# Altium PCB Intelligent_Agriculture.PcbDoc (part 4 of 5)
Units mm, origin at the board's own origin, x right, y up, seen from the top; angles counter-clockwise.
Board outline 99.69 x 99.69 mm, 2 copper layers (Top Layer, Bottom Layer); 90 components, 60 nets, 339 pads, 86 vias.
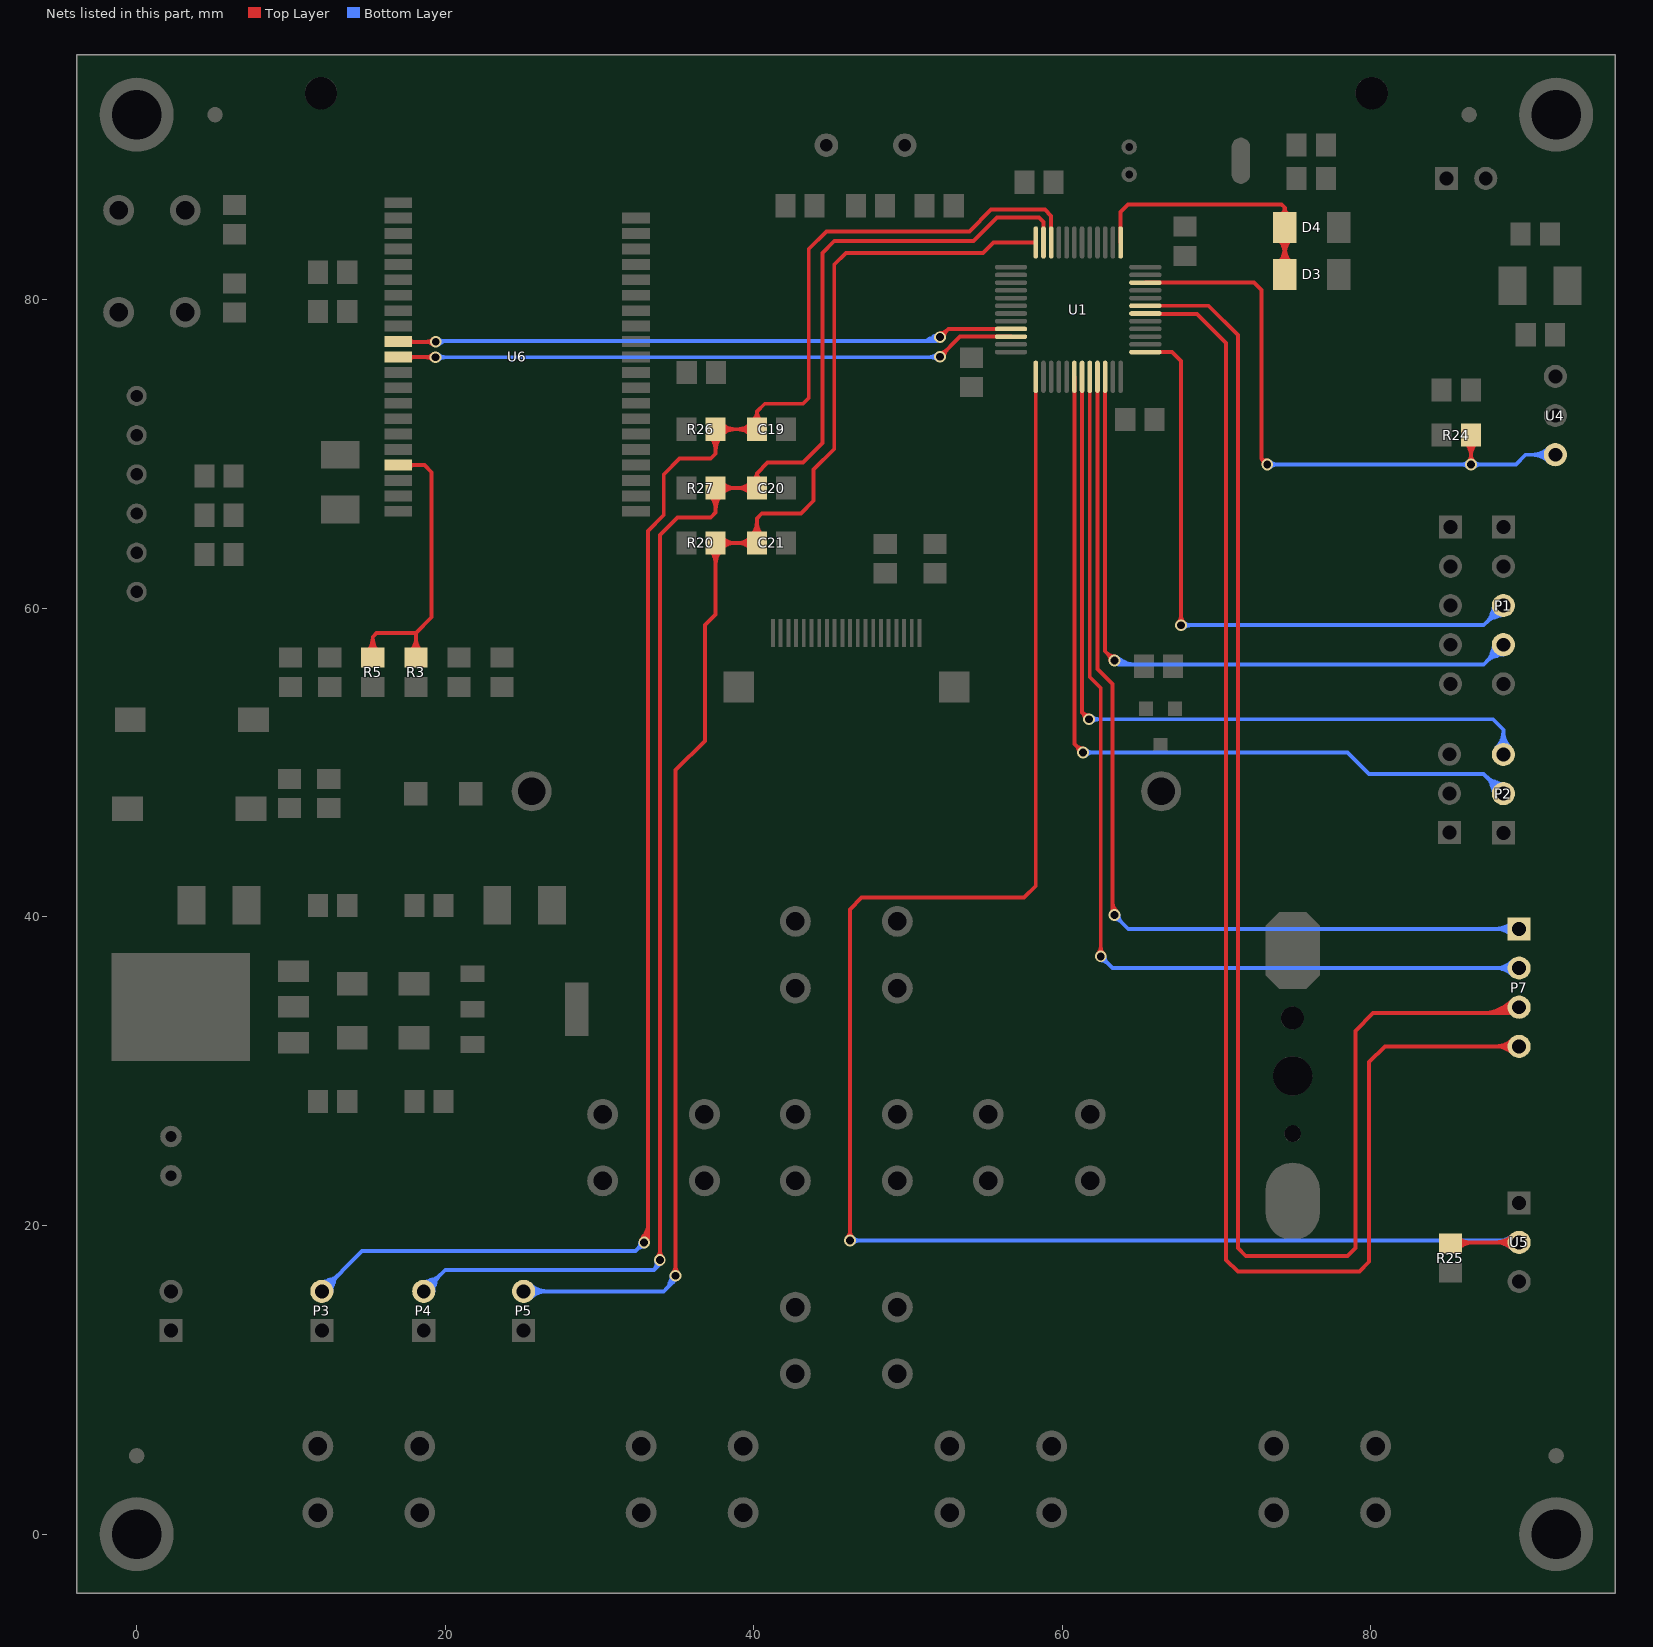
[diagram p4: the nets of this part, all layers, seen from the top]

## Via types
v1: diameter 0.762, hole 0.508, Top Layer to Bottom Layer, tented both sides, 82 vias
v2: diameter 4.8, hole 3.2, Top Layer to Bottom Layer, tented both sides, 4 vias

## Nets (pads, with @x,y where several pads share a name; then routed paths per layer and width w, separated by ;. In a path a pad name is that pad's centre, name@x,y a point inside that pad or via, vN(x,y) a via of type N, cw(c..) or ccw(c..) an arc to the next point about the centre after c; other vN are vias at no path point) (continued)
PA0: C19.2 P3.2 R26.1 U1.10 | length 167
  Top Layer w0.254: U1.10@59.274,83.717 59.274,85.431 58.865,85.84 55.377,85.84 53.975,84.438 44.704,84.438 43.561,83.295 43.561,73.643 43.18,73.262 40.706,73.262 40.198,72.754 ; v1@32.713,19.086 ccw(c31.667,20.132) 33.147,20.132 ; v1@32.713,19.086 ccw(c31.667,20.132) 33.147,20.132 ; v1@32.713,19.086 ccw(c31.667,20.132) 33.147,20.132 ; 32.85,19.322 ccw(c33.159,19.144) v1(32.893,18.906) ; 32.85,19.322 ccw(c33.159,19.144) v1(32.893,18.906) ; 32.85,19.322 ccw(c33.159,19.144) v1(32.893,18.906) ; v1@32.889,19.16 ccw(c32.884,19.43) 33.117,19.295 ; v1@32.889,19.16 ccw(c32.884,19.43) 33.117,19.295 ; v1@32.889,19.16 ccw(c32.884,19.43) 33.117,19.295 ; v1(32.893,18.906) ccw(c32.28,19.519) 33.147,19.519 ; v1(32.893,18.906) ccw(c32.28,19.519) 33.147,19.519 ; v1(32.893,18.906) ccw(c32.28,19.519) 33.147,19.519 ; v1(32.893,18.906) 33.147,19.16 33.147,65.024 34.163,66.04 34.163,68.69 35.179,69.706 37.211,69.706 37.526,70.021 R26.1@37.526,71.611 C19.2@40.198,71.611 40.198,72.754 ; 33.026,19.627 ccw(c33.435,19.39) v1@33.082,19.075 ; 33.026,19.627 ccw(c33.435,19.39) v1@33.082,19.075 ; 33.026,19.627 ccw(c33.435,19.39) v1@33.082,19.075 ; v1@33.115,19.029 cw(c33.351,19.16) 33.117,19.295 ; v1@33.115,19.029 cw(c33.351,19.16) 33.117,19.295 ; v1@33.115,19.029 cw(c33.351,19.16) 33.117,19.295 ; R26.1@37.156,71.141 cw(c36.263,70.248) 37.526,70.248 ; R26.1@37.156,71.141 cw(c36.263,70.248) 37.526,70.248 ; R26.1@37.156,71.141 cw(c36.263,70.248) 37.526,70.248 ; 37.526,70.248 cw(c38.789,70.248) R26.1@37.896,71.141 ; 37.526,70.248 cw(c38.789,70.248) R26.1@37.896,71.141 ; 37.526,70.248 cw(c38.789,70.248) R26.1@37.896,71.141 ; R26.1@37.896,71.241 cw(c38.789,70.348) 38.789,71.611 ; R26.1@37.896,71.241 cw(c38.789,70.348) 38.789,71.611 ; R26.1@37.896,71.241 cw(c38.789,70.348) 38.789,71.611 ; R26.1@37.896,71.981 ccw(c38.789,72.874) 38.789,71.611 ; R26.1@37.896,71.981 ccw(c38.789,72.874) 38.789,71.611 ; R26.1@37.896,71.981 ccw(c38.789,72.874) 38.789,71.611 ; 38.935,71.611 ccw(c38.935,72.874) C19.2@39.828,71.981 ; 38.935,71.611 cw(c38.935,70.348) C19.2@39.828,71.241 ; 38.935,71.611 ccw(c38.935,72.874) C19.2@39.828,71.981 ; 38.935,71.611 cw(c38.935,70.348) C19.2@39.828,71.241 ; 38.935,71.611 ccw(c38.935,72.874) C19.2@39.828,71.981 ; 38.935,71.611 cw(c38.935,70.348) C19.2@39.828,71.241 ; C19.2@39.885,72.13 ccw(c39.42,72.754) 40.198,72.754 ; C19.2@39.885,72.13 ccw(c39.42,72.754) 40.198,72.754 ; C19.2@39.885,72.13 ccw(c39.42,72.754) 40.198,72.754 ; 40.198,72.754 ccw(c40.976,72.754) C19.2@40.511,72.13 ; 40.198,72.754 ccw(c40.976,72.754) C19.2@40.511,72.13 ; 40.198,72.754 ccw(c40.976,72.754) C19.2@40.511,72.13
  Bottom Layer w0.254: P3.2@12.002,15.736 14.605,18.339 32.326,18.339 v1(32.893,18.906) ; P3.2@11.866,15.764 cw(c12.822,15.568) 12.57,16.511 ; P3.2@11.866,15.764 cw(c12.822,15.568) 12.57,16.511 ; P3.2@11.866,15.764 cw(c12.822,15.568) 12.57,16.511 ; P3.2@12.002,16.105 ccw(c12.002,16.996) 12.632,16.366 ; P3.2@12.002,16.105 ccw(c12.002,16.996) 12.632,16.366 ; P3.2@12.002,16.105 ccw(c12.002,16.996) 12.632,16.366 ; P3.2@12.002,16.359 ccw(c12.002,17.863) 13.066,16.8 ; P3.2@12.002,16.359 ccw(c12.002,17.863) 13.066,16.8 ; P3.2@12.002,16.359 ccw(c12.002,17.863) 13.066,16.8 ; P3.2@12.03,15.6 ccw(c11.834,16.556) 12.777,16.304 ; P3.2@12.03,15.6 ccw(c11.834,16.556) 12.777,16.304 ; P3.2@12.03,15.6 ccw(c11.834,16.556) 12.777,16.304 ; P3.2@12.371,15.736 cw(c13.262,15.736) 12.632,16.366 ; P3.2@12.371,15.736 cw(c13.262,15.736) 12.632,16.366 ; P3.2@12.371,15.736 cw(c13.262,15.736) 12.632,16.366 ; P3.2@12.625,15.736 cw(c14.129,15.736) 13.066,16.8 ; P3.2@12.625,15.736 cw(c14.129,15.736) 13.066,16.8 ; P3.2@12.625,15.736 cw(c14.129,15.736) 13.066,16.8 ; 32.459,18.472 ccw(c32.026,18.906) v1@32.639,18.906 ; 32.459,18.472 cw(c32.893,18.039) v1@32.893,18.652 ; 32.459,18.472 ccw(c32.026,18.906) v1@32.639,18.906 ; 32.459,18.472 cw(c32.893,18.039) v1@32.893,18.652 ; 32.459,18.472 ccw(c32.026,18.906) v1@32.639,18.906 ; 32.459,18.472 cw(c32.893,18.039) v1@32.893,18.652
PA1: C20.2 P4.2 R27.1 U1.11 | length 149.8
  Top Layer w0.254: v1(33.909,17.763) 33.909,64.753 35.052,65.896 37.211,65.896 37.526,66.211 R27.1@37.526,67.801 C20.2@40.198,67.801 40.198,68.756 ; U1.11@58.774,83.717 58.774,85.042 58.484,85.332 55.758,85.332 54.229,83.803 45.212,83.803 44.45,83.041 44.45,70.722 43.18,69.452 40.894,69.452 40.198,68.756 ; v1@33.729,17.943 ccw(c33.296,18.376) 33.909,18.376 ; v1@33.729,17.943 ccw(c33.296,18.376) 33.909,18.376 ; v1@33.729,17.943 ccw(c33.296,18.376) 33.909,18.376 ; 33.909,18.376 ccw(c34.522,18.376) v1@34.089,17.943 ; 33.909,18.376 ccw(c34.522,18.376) v1@34.089,17.943 ; 33.909,18.376 ccw(c34.522,18.376) v1@34.089,17.943 ; R27.1@37.156,67.331 cw(c36.263,66.438) 37.526,66.438 ; R27.1@37.156,67.331 cw(c36.263,66.438) 37.526,66.438 ; R27.1@37.156,67.331 cw(c36.263,66.438) 37.526,66.438 ; 37.526,66.438 cw(c38.789,66.438) R27.1@37.896,67.331 ; 37.526,66.438 cw(c38.789,66.438) R27.1@37.896,67.331 ; 37.526,66.438 cw(c38.789,66.438) R27.1@37.896,67.331 ; R27.1@37.896,67.431 cw(c38.789,66.538) 38.789,67.801 ; R27.1@37.896,67.431 cw(c38.789,66.538) 38.789,67.801 ; R27.1@37.896,67.431 cw(c38.789,66.538) 38.789,67.801 ; R27.1@37.896,68.171 ccw(c38.789,69.064) 38.789,67.801 ; R27.1@37.896,68.171 ccw(c38.789,69.064) 38.789,67.801 ; R27.1@37.896,68.171 ccw(c38.789,69.064) 38.789,67.801 ; 38.935,67.801 ccw(c38.935,69.064) C20.2@39.828,68.171 ; 38.935,67.801 cw(c38.935,66.538) C20.2@39.828,67.431 ; 38.935,67.801 ccw(c38.935,69.064) C20.2@39.828,68.171 ; 38.935,67.801 cw(c38.935,66.538) C20.2@39.828,67.431 ; 38.935,67.801 ccw(c38.935,69.064) C20.2@39.828,68.171 ; 38.935,67.801 cw(c38.935,66.538) C20.2@39.828,67.431 ; C20.2@39.96,68.367 ccw(c39.761,68.756) 40.198,68.756 ; C20.2@39.96,68.367 ccw(c39.761,68.756) 40.198,68.756 ; C20.2@39.96,68.367 ccw(c39.761,68.756) 40.198,68.756 ; 40.198,68.756 ccw(c40.635,68.756) C20.2@40.436,68.367 ; 40.198,68.756 ccw(c40.635,68.756) C20.2@40.436,68.367 ; 40.198,68.756 ccw(c40.635,68.756) C20.2@40.436,68.367
  Bottom Layer w0.254: P4.2@18.606,15.736 19.998,17.128 33.528,17.128 ; v1@33.909,17.509 33.528,17.128 ; P4.2@18.47,15.764 cw(c19.426,15.568) 19.174,16.511 ; P4.2@18.47,15.764 cw(c19.426,15.568) 19.174,16.511 ; P4.2@18.47,15.764 cw(c19.426,15.568) 19.174,16.511 ; P4.2@18.606,16.105 ccw(c18.606,16.996) 19.236,16.366 ; P4.2@18.606,16.105 ccw(c18.606,16.996) 19.236,16.366 ; P4.2@18.606,16.105 ccw(c18.606,16.996) 19.236,16.366 ; P4.2@18.606,16.359 ccw(c18.606,17.863) 19.67,16.8 ; P4.2@18.606,16.359 ccw(c18.606,17.863) 19.67,16.8 ; P4.2@18.606,16.359 ccw(c18.606,17.863) 19.67,16.8 ; P4.2@18.634,15.6 ccw(c18.438,16.556) 19.381,16.304 ; P4.2@18.634,15.6 ccw(c18.438,16.556) 19.381,16.304 ; P4.2@18.634,15.6 ccw(c18.438,16.556) 19.381,16.304 ; P4.2@18.975,15.736 cw(c19.866,15.736) 19.236,16.366 ; P4.2@18.975,15.736 cw(c19.866,15.736) 19.236,16.366 ; P4.2@18.975,15.736 cw(c19.866,15.736) 19.236,16.366 ; P4.2@19.229,15.736 cw(c20.733,15.736) 19.67,16.8 ; P4.2@19.229,15.736 cw(c20.733,15.736) 19.67,16.8 ; P4.2@19.229,15.736 cw(c20.733,15.736) 19.67,16.8 ; 33.528,17.128 ccw(c33.134,17.523) v1@33.666,17.688 ; 33.528,17.128 ccw(c33.134,17.523) v1@33.666,17.688 ; 33.528,17.128 ccw(c33.134,17.523) v1@33.666,17.688
PA2: C21.2 P5.2 R20.1 U1.12 | length 140.8
  Top Layer w0.254: v1(34.925,16.747) 34.925,49.513 36.83,51.418 36.83,58.911 37.526,59.607 R20.1@37.526,64.245 C21.2@40.198,64.245 40.198,65.835 40.513,66.15 43.053,66.15 43.879,66.976 43.879,69.008 45.212,70.341 45.212,82.279 45.974,83.041 54.864,83.041 55.54,83.717 U1.12@58.274,83.717 ; v1@34.745,16.927 ccw(c34.312,17.36) 34.925,17.36 ; v1@34.745,16.927 ccw(c34.312,17.36) 34.925,17.36 ; v1@34.745,16.927 ccw(c34.312,17.36) 34.925,17.36 ; 34.925,17.36 ccw(c35.538,17.36) v1@35.105,16.927 ; 34.925,17.36 ccw(c35.538,17.36) v1@35.105,16.927 ; 34.925,17.36 ccw(c35.538,17.36) v1@35.105,16.927 ; R20.1@37.156,63.775 cw(c36.263,62.882) 37.526,62.882 ; R20.1@37.156,63.775 cw(c36.263,62.882) 37.526,62.882 ; R20.1@37.156,63.775 cw(c36.263,62.882) 37.526,62.882 ; 37.526,62.882 cw(c38.789,62.882) R20.1@37.896,63.775 ; 37.526,62.882 cw(c38.789,62.882) R20.1@37.896,63.775 ; 37.526,62.882 cw(c38.789,62.882) R20.1@37.896,63.775 ; R20.1@37.896,63.875 cw(c38.789,62.982) 38.789,64.245 ; R20.1@37.896,63.875 cw(c38.789,62.982) 38.789,64.245 ; R20.1@37.896,63.875 cw(c38.789,62.982) 38.789,64.245 ; R20.1@37.896,64.615 ccw(c38.789,65.508) 38.789,64.245 ; R20.1@37.896,64.615 ccw(c38.789,65.508) 38.789,64.245 ; R20.1@37.896,64.615 ccw(c38.789,65.508) 38.789,64.245 ; 38.935,64.245 ccw(c38.935,65.508) C21.2@39.828,64.615 ; 38.935,64.245 cw(c38.935,62.982) C21.2@39.828,63.875 ; 38.935,64.245 ccw(c38.935,65.508) C21.2@39.828,64.615 ; 38.935,64.245 cw(c38.935,62.982) C21.2@39.828,63.875 ; 38.935,64.245 ccw(c38.935,65.508) C21.2@39.828,64.615 ; 38.935,64.245 cw(c38.935,62.982) C21.2@39.828,63.875 ; C21.2@39.828,64.715 ccw(c38.935,65.608) 40.198,65.608 ; C21.2@39.828,64.715 ccw(c38.935,65.608) 40.198,65.608 ; C21.2@39.828,64.715 ccw(c38.935,65.608) 40.198,65.608 ; 40.198,65.608 ccw(c41.461,65.608) C21.2@40.568,64.715 ; 40.198,65.608 ccw(c41.461,65.608) C21.2@40.568,64.715 ; 40.198,65.608 ccw(c41.461,65.608) C21.2@40.568,64.715
  Bottom Layer w0.254: P5.2@25.083,15.736 34.158,15.736 34.163,15.731 v1@34.925,16.493 ; P5.2@25.344,15.475 cw(c25.974,14.845) 25.974,15.736 ; P5.2@25.344,15.475 cw(c25.974,14.845) 25.974,15.736 ; P5.2@25.344,15.475 cw(c25.974,14.845) 25.974,15.736 ; P5.2@25.344,15.997 ccw(c25.974,16.627) 25.974,15.736 ; P5.2@25.344,15.997 ccw(c25.974,16.627) 25.974,15.736 ; P5.2@25.344,15.997 ccw(c25.974,16.627) 25.974,15.736 ; P5.2@25.524,15.295 cw(c26.587,14.232) 26.587,15.736 ; P5.2@25.524,15.295 cw(c26.587,14.232) 26.587,15.736 ; P5.2@25.524,15.295 cw(c26.587,14.232) 26.587,15.736 ; P5.2@25.524,16.177 ccw(c26.587,17.24) 26.587,15.736 ; P5.2@25.524,16.177 ccw(c26.587,17.24) 26.587,15.736 ; P5.2@25.524,16.177 ccw(c26.587,17.24) 26.587,15.736 ; 34.312,15.88 ccw(c33.445,16.747) v1@34.671,16.747 ; 34.312,15.88 ccw(c33.445,16.747) v1@34.671,16.747 ; 34.312,15.88 ccw(c33.445,16.747) v1@34.671,16.747 ; 34.545,16.276 cw(c35.265,16.083) v1(34.925,16.747) ; 34.545,16.276 cw(c35.265,16.083) v1(34.925,16.747) ; 34.545,16.276 cw(c35.265,16.083) v1(34.925,16.747) ; 34.745,16.313 ccw(c34.312,16.747) v1(34.925,16.747) ; 34.745,16.313 ccw(c34.312,16.747) v1(34.925,16.747) ; 34.745,16.313 ccw(c34.312,16.747) v1(34.925,16.747)
RELAY1: P7.1 U1.33 | length 78.6
  Top Layer w0.254: U1.33@62.274,75.009 62.274,56.073 63.246,55.101 63.246,40.252 v1(63.373,40.125) ; 63.246,41.045 ccw(c64.293,41.045) v1@63.553,40.305 ; 63.246,41.045 ccw(c64.293,41.045) v1@63.553,40.305 ; 63.246,41.045 ccw(c64.293,41.045) v1@63.553,40.305
  Bottom Layer w0.254: v1(63.373,40.125) 64.267,39.231 P7.1@89.599,39.231 ; v1@63.373,39.871 cw(c63.373,39.258) 63.807,39.691 ; v1@63.373,39.871 cw(c63.373,39.258) 63.807,39.691 ; v1@63.373,39.871 cw(c63.373,39.258) 63.807,39.691 ; v1@63.627,40.125 ccw(c64.24,40.125) 63.807,39.691 ; v1@63.627,40.125 ccw(c64.24,40.125) 63.807,39.691 ; v1@63.627,40.125 ccw(c64.24,40.125) 63.807,39.691 ; 88.095,39.231 ccw(c88.095,40.735) P7.1@89.158,39.672 ; 88.095,39.231 cw(c88.095,37.727) P7.1@89.158,38.79 ; 88.095,39.231 ccw(c88.095,40.735) P7.1@89.158,39.672 ; 88.095,39.231 cw(c88.095,37.727) P7.1@89.158,38.79 ; 88.095,39.231 ccw(c88.095,40.735) P7.1@89.158,39.672 ; 88.095,39.231 cw(c88.095,37.727) P7.1@89.158,38.79 ; 88.708,39.231 ccw(c88.708,40.122) P7.1@89.338,39.492 ; 88.708,39.231 cw(c88.708,38.34) P7.1@89.338,38.97 ; 88.708,39.231 ccw(c88.708,40.122) P7.1@89.338,39.492 ; 88.708,39.231 cw(c88.708,38.34) P7.1@89.338,38.97 ; 88.708,39.231 ccw(c88.708,40.122) P7.1@89.338,39.492 ; 88.708,39.231 cw(c88.708,38.34) P7.1@89.338,38.97
RELAY2: P7.2 U1.32 | length 82.3
  Top Layer w0.254: U1.32@61.774,75.009 61.774,55.557 62.484,54.847 62.484,42.782 v1(62.484,37.448) ; v1@62.304,37.628 ccw(c61.871,38.061) 62.484,38.061 ; v1@62.304,37.628 ccw(c61.871,38.061) 62.484,38.061 ; v1@62.304,37.628 ccw(c61.871,38.061) 62.484,38.061 ; 62.484,38.061 ccw(c63.097,38.061) v1@62.664,37.628 ; 62.484,38.061 ccw(c63.097,38.061) v1@62.664,37.628 ; 62.484,38.061 ccw(c63.097,38.061) v1@62.664,37.628
  Bottom Layer w0.254: v1(62.484,37.448) 63.241,36.691 89.53,36.691 P7.2@89.599,36.691 ; v1@62.484,37.194 cw(c62.484,36.581) 62.918,37.014 ; v1@62.484,37.194 cw(c62.484,36.581) 62.918,37.014 ; v1@62.484,37.194 cw(c62.484,36.581) 62.918,37.014 ; v1@62.738,37.448 ccw(c63.351,37.448) 62.918,37.014 ; v1@62.738,37.448 ccw(c63.351,37.448) 62.918,37.014 ; v1@62.738,37.448 ccw(c63.351,37.448) 62.918,37.014 ; 88.095,36.691 ccw(c88.095,38.195) P7.2@89.158,37.132 ; 88.095,36.691 cw(c88.095,35.187) P7.2@89.158,36.25 ; 88.095,36.691 ccw(c88.095,38.195) P7.2@89.158,37.132 ; 88.095,36.691 cw(c88.095,35.187) P7.2@89.158,36.25 ; 88.095,36.691 ccw(c88.095,38.195) P7.2@89.158,37.132 ; 88.095,36.691 cw(c88.095,35.187) P7.2@89.158,36.25 ; 88.708,36.691 ccw(c88.708,37.582) P7.2@89.338,36.952 ; 88.708,36.691 cw(c88.708,35.8) P7.2@89.338,36.43 ; 88.708,36.691 ccw(c88.708,37.582) P7.2@89.338,36.952 ; 88.708,36.691 cw(c88.708,35.8) P7.2@89.338,36.43 ; 88.708,36.691 ccw(c88.708,37.582) P7.2@89.338,36.952 ; 88.708,36.691 cw(c88.708,35.8) P7.2@89.338,36.43
RELAY3: P7.3 U1.43 | length 120.2
  Top Layer w0.254: U1.43@65.378,79.613 69.468,79.613 71.374,77.707 71.374,18.542 71.882,18.034 78.486,18.034 78.994,18.542 78.994,32.622 80.137,33.765 89.213,33.765 P7.3@89.599,34.151 ; 87.163,33.765 ccw(c87.163,36.587) P7.3@89.158,34.592 ; 87.163,33.765 ccw(c87.163,36.587) P7.3@89.158,34.592 ; 87.163,33.765 ccw(c87.163,36.587) P7.3@89.158,34.592 ; 87.776,33.765 ccw(c87.776,35.974) P7.3@89.338,34.412 ; 87.776,33.765 ccw(c87.776,35.974) P7.3@89.338,34.412 ; 87.776,33.765 ccw(c87.776,35.974) P7.3@89.338,34.412 ; 88.389,33.765 ccw(c88.389,35.361) P7.3@89.518,34.232 ; 88.389,33.765 ccw(c88.389,35.361) P7.3@89.518,34.232 ; 88.389,33.765 ccw(c88.389,35.361) P7.3@89.518,34.232 ; 88.526,33.943 cw(c88.732,33.587) P7.3@89.077,33.811 ; 88.526,33.943 cw(c88.732,33.587) P7.3@89.077,33.811 ; 88.526,33.943 cw(c88.732,33.587) P7.3@89.077,33.811 ; 88.758,34.077 cw(c88.957,33.733) P7.3@89.29,33.95 ; 88.758,34.077 cw(c88.957,33.733) P7.3@89.29,33.95 ; 88.758,34.077 cw(c88.957,33.733) P7.3@89.29,33.95 ; 88.858,33.851 ccw(c88.736,34.064) P7.3@88.979,34.088 ; 88.858,33.851 cw(c88.943,33.704) P7.3@89.084,33.8 ; 88.858,33.851 ccw(c88.736,34.064) P7.3@88.979,34.088 ; 88.858,33.851 cw(c88.943,33.704) P7.3@89.084,33.8 ; 88.858,33.851 ccw(c88.736,34.064) P7.3@88.979,34.088 ; 88.858,33.851 cw(c88.943,33.704) P7.3@89.084,33.8
RELAY4: P7.4 U1.42 | length 109.7
  Top Layer w0.254: U1.42@65.378,79.113 65.411,79.081 68.731,79.081 70.612,77.199 70.612,17.78 71.374,17.018 79.248,17.018 79.883,17.653 79.883,30.59 80.904,31.611 P7.4@89.599,31.611 ; 88.095,31.611 ccw(c88.095,33.115) P7.4@89.158,32.052 ; 88.095,31.611 cw(c88.095,30.107) P7.4@89.158,31.17 ; 88.095,31.611 ccw(c88.095,33.115) P7.4@89.158,32.052 ; 88.095,31.611 cw(c88.095,30.107) P7.4@89.158,31.17 ; 88.095,31.611 ccw(c88.095,33.115) P7.4@89.158,32.052 ; 88.095,31.611 cw(c88.095,30.107) P7.4@89.158,31.17 ; 88.708,31.611 ccw(c88.708,32.502) P7.4@89.338,31.872 ; 88.708,31.611 cw(c88.708,30.72) P7.4@89.338,31.35 ; 88.708,31.611 ccw(c88.708,32.502) P7.4@89.338,31.872 ; 88.708,31.611 cw(c88.708,30.72) P7.4@89.338,31.35 ; 88.708,31.611 ccw(c88.708,32.502) P7.4@89.338,31.872 ; 88.708,31.611 cw(c88.708,30.72) P7.4@89.338,31.35
REMOTE: R24.2 U1.46 U4.1 | length 69
  Top Layer w0.254: U1.46@65.378,81.113 72.413,81.113 72.898,80.628 72.898,69.706 ; v1(73.279,69.325) 72.898,69.706 ; R24.2@86.485,71.235 86.487,71.233 v1(86.487,69.325) ; 72.898,69.706 ccw(c73.212,70.02) v1@73.255,69.578 ; 72.898,69.706 cw(c72.584,69.392) v1@73.026,69.349 ; 72.898,69.706 ccw(c73.212,70.02) v1@73.255,69.578 ; 72.898,69.706 cw(c72.584,69.392) v1@73.026,69.349 ; 72.898,69.706 ccw(c73.212,70.02) v1@73.255,69.578 ; 72.898,69.706 cw(c72.584,69.392) v1@73.026,69.349 ; R24.2@86.115,70.765 cw(c85.218,69.868) 86.487,69.868 ; R24.2@86.115,70.765 cw(c85.218,69.868) 86.487,69.868 ; R24.2@86.115,70.765 cw(c85.218,69.868) 86.487,69.868 ; R24.2@86.295,70.945 cw(c85.831,70.481) 86.487,70.481 ; R24.2@86.295,70.945 cw(c85.831,70.481) 86.487,70.481 ; R24.2@86.295,70.945 cw(c85.831,70.481) 86.487,70.481 ; v1@86.307,69.505 ccw(c85.874,69.938) 86.487,69.938 ; v1@86.307,69.505 ccw(c85.874,69.938) 86.487,69.938 ; v1@86.307,69.505 ccw(c85.874,69.938) 86.487,69.938 ; 86.487,69.877 cw(c87.743,69.877) R24.2@86.855,70.765 ; 86.487,69.877 cw(c87.743,69.877) R24.2@86.855,70.765 ; 86.487,69.877 cw(c87.743,69.877) R24.2@86.855,70.765 ; 86.487,69.938 ccw(c87.1,69.938) v1@86.667,69.505 ; 86.487,69.938 ccw(c87.1,69.938) v1@86.667,69.505 ; 86.487,69.938 ccw(c87.1,69.938) v1@86.667,69.505
  Bottom Layer w0.254: v1(73.279,69.325) v1(86.487,69.325) 89.391,69.325 90.026,69.96 U4.1@91.949,69.96 ; v1@73.459,69.145 cw(c73.892,68.712) 73.892,69.325 ; v1@73.459,69.145 cw(c73.892,68.712) 73.892,69.325 ; v1@73.459,69.145 cw(c73.892,68.712) 73.892,69.325 ; v1@73.459,69.505 ccw(c73.892,69.938) 73.892,69.325 ; v1@73.459,69.505 ccw(c73.892,69.938) 73.892,69.325 ; v1@73.459,69.505 ccw(c73.892,69.938) 73.892,69.325 ; 85.874,69.325 ccw(c85.874,69.938) v1@86.307,69.505 ; 85.874,69.325 cw(c85.874,68.712) v1@86.307,69.145 ; 85.874,69.325 ccw(c85.874,69.938) v1@86.307,69.505 ; 85.874,69.325 cw(c85.874,68.712) v1@86.307,69.145 ; 85.874,69.325 ccw(c85.874,69.938) v1@86.307,69.505 ; 85.874,69.325 cw(c85.874,68.712) v1@86.307,69.145 ; v1@86.667,69.145 cw(c87.1,68.712) 87.1,69.325 ; v1@86.667,69.145 cw(c87.1,68.712) 87.1,69.325 ; v1@86.667,69.145 cw(c87.1,68.712) 87.1,69.325 ; v1@86.667,69.505 ccw(c87.1,69.938) 87.1,69.325 ; v1@86.667,69.505 ccw(c87.1,69.938) 87.1,69.325 ; v1@86.667,69.505 ccw(c87.1,69.938) 87.1,69.325 ; 90.445,69.96 ccw(c90.445,71.464) 91.508,70.401 cw(c90.445,71.464) 90.445,69.96 ; 90.445,69.96 cw(c90.445,68.456) 91.508,69.519 ccw(c90.445,68.456) 90.445,69.96 ; 91.058,69.96 ccw(c91.058,70.851) 91.688,70.221 cw(c91.058,70.851) 91.058,69.96 ; 91.058,69.96 cw(c91.058,69.069) 91.688,69.699 ccw(c91.058,69.069) 91.058,69.96
RX1: P2.3 U1.31 | length 71.1
  Top Layer w0.254: U1.31@61.274,75.009 61.274,53.263 v1(61.722,52.815) ; 61.288,53.249 ccw(c61.722,53.682) v1@61.722,53.069 ; 61.288,53.249 cw(c60.855,52.815) v1@61.468,52.815 ; 61.288,53.249 ccw(c61.722,53.682) v1@61.722,53.069 ; 61.288,53.249 cw(c60.855,52.815) v1@61.468,52.815 ; 61.288,53.249 ccw(c61.722,53.682) v1@61.722,53.069 ; 61.288,53.249 cw(c60.855,52.815) v1@61.468,52.815 ; 61.382,53.135 ccw(c61.811,53.25) v1(61.722,52.815) ; 61.382,53.135 ccw(c61.811,53.25) v1(61.722,52.815) ; 61.382,53.135 ccw(c61.811,53.25) v1(61.722,52.815) ; 61.402,53.155 cw(c61.287,52.726) v1(61.722,52.815) ; 61.402,53.155 cw(c61.287,52.726) v1(61.722,52.815) ; 61.402,53.155 cw(c61.287,52.726) v1(61.722,52.815)
  Bottom Layer w0.254: v1(61.722,52.815) 87.901,52.815 88.583,52.133 P2.3@88.583,50.534 ; v1@61.902,52.635 cw(c62.335,52.202) 62.335,52.815 ; v1@61.902,52.635 cw(c62.335,52.202) 62.335,52.815 ; v1@61.902,52.635 cw(c62.335,52.202) 62.335,52.815 ; v1@61.902,52.995 ccw(c62.335,53.428) 62.335,52.815 ; v1@61.902,52.995 ccw(c62.335,53.428) 62.335,52.815 ; v1@61.902,52.995 ccw(c62.335,53.428) 62.335,52.815 ; P2.3@88.142,50.975 ccw(c87.079,52.038) 88.583,52.038 ; P2.3@88.142,50.975 ccw(c87.079,52.038) 88.583,52.038 ; P2.3@88.142,50.975 ccw(c87.079,52.038) 88.583,52.038 ; P2.3@88.322,50.795 ccw(c87.692,51.425) 88.583,51.425 ; P2.3@88.322,50.795 ccw(c87.692,51.425) 88.583,51.425 ; P2.3@88.322,50.795 ccw(c87.692,51.425) 88.583,51.425 ; 88.583,51.425 ccw(c89.474,51.425) P2.3@88.844,50.795 ; 88.583,51.425 ccw(c89.474,51.425) P2.3@88.844,50.795 ; 88.583,51.425 ccw(c89.474,51.425) P2.3@88.844,50.795 ; 88.583,52.038 ccw(c90.087,52.038) P2.3@89.024,50.975 ; 88.583,52.038 ccw(c90.087,52.038) P2.3@89.024,50.975 ; 88.583,52.038 ccw(c90.087,52.038) P2.3@89.024,50.975
RX3: U1.22 U6.30 | length 57.3
  Top Layer w0.254: U6.30@16.922,76.282 v1@19.363,76.282 ; U1.22@56.67,77.613 53.373,77.613 v1(52.07,76.31) ; U6.30@17.63,76.124 cw(c18.01,75.744) 18.01,76.282 ; U6.30@17.63,76.124 cw(c18.01,75.744) 18.01,76.282 ; U6.30@17.63,76.124 cw(c18.01,75.744) 18.01,76.282 ; U6.30@17.63,76.44 ccw(c18.01,76.82) 18.01,76.282 ; U6.30@17.63,76.44 ccw(c18.01,76.82) 18.01,76.282 ; U6.30@17.63,76.44 ccw(c18.01,76.82) 18.01,76.282 ; 18.743,76.282 cw(c18.743,75.652) v1@19.188,76.097 ; 18.743,76.282 cw(c18.743,75.652) v1@19.188,76.097 ; 18.743,76.282 cw(c18.743,75.652) v1@19.188,76.097 ; 18.767,76.282 ccw(c18.767,76.878) v1@19.188,76.457 ; 18.767,76.282 ccw(c18.767,76.878) v1@19.188,76.457 ; 18.767,76.282 ccw(c18.767,76.878) v1@19.188,76.457 ; v1(52.07,76.31) ccw(c51.981,76.745) 52.41,76.63 ; v1(52.07,76.31) cw(c52.505,76.221) 52.39,76.65 ; v1(52.07,76.31) ccw(c51.981,76.745) 52.41,76.63 ; v1(52.07,76.31) cw(c52.505,76.221) 52.39,76.65 ; v1(52.07,76.31) ccw(c51.981,76.745) 52.41,76.63 ; v1(52.07,76.31) cw(c52.505,76.221) 52.39,76.65 ; v1@52.07,76.564 ccw(c52.07,77.177) 52.504,76.744 ; v1@52.07,76.564 ccw(c52.07,77.177) 52.504,76.744 ; v1@52.07,76.564 ccw(c52.07,77.177) 52.504,76.744 ; v1@52.324,76.31 cw(c52.937,76.31) 52.504,76.744 ; v1@52.324,76.31 cw(c52.937,76.31) 52.504,76.744 ; v1@52.324,76.31 cw(c52.937,76.31) 52.504,76.744
  Bottom Layer w0.254: v1(19.368,76.277) v1@52.037,76.277 ; v1@19.548,76.097 cw(c19.981,75.664) 19.981,76.277 ; v1@19.548,76.097 cw(c19.981,75.664) 19.981,76.277 ; v1@19.548,76.097 cw(c19.981,75.664) 19.981,76.277 ; v1@19.548,76.457 ccw(c19.981,76.89) 19.981,76.277 ; v1@19.548,76.457 ccw(c19.981,76.89) 19.981,76.277 ; v1@19.548,76.457 ccw(c19.981,76.89) 19.981,76.277 ; 51.377,76.277 ccw(c51.377,77.003) v1@51.89,76.49 ; 51.377,76.277 ccw(c51.377,77.003) v1@51.89,76.49 ; 51.377,76.277 ccw(c51.377,77.003) v1@51.89,76.49 ; 51.536,76.277 cw(c51.536,75.776) v1@51.89,76.13 ; 51.536,76.277 cw(c51.536,75.776) v1@51.89,76.13 ; 51.536,76.277 cw(c51.536,75.776) v1@51.89,76.13
STATUS: R3.1 R5.1 U6.37 | length 33.5
  Top Layer w0.254: R5.1@15.304,56.818 15.304,58.154 15.558,58.408 18.098,58.408 ; U6.37@16.922,69.282 18.654,69.282 19.114,68.822 19.114,59.424 18.098,58.408 ; R3.1@18.098,56.818 18.098,58.408 ; R5.1@14.934,57.188 ccw(c14.041,58.081) 15.304,58.081 ; R5.1@14.934,57.188 ccw(c14.041,58.081) 15.304,58.081 ; R5.1@14.934,57.188 ccw(c14.041,58.081) 15.304,58.081 ; 15.304,58.081 ccw(c16.567,58.081) R5.1@15.674,57.188 ; 15.304,58.081 ccw(c16.567,58.081) R5.1@15.674,57.188 ; 15.304,58.081 ccw(c16.567,58.081) R5.1@15.674,57.188 ; U6.37@17.63,69.124 cw(c18.01,68.744) 18.01,69.282 ; U6.37@17.63,69.124 cw(c18.01,68.744) 18.01,69.282 ; U6.37@17.63,69.124 cw(c18.01,68.744) 18.01,69.282 ; U6.37@17.63,69.44 ccw(c18.01,69.82) 18.01,69.282 ; U6.37@17.63,69.44 ccw(c18.01,69.82) 18.01,69.282 ; U6.37@17.63,69.44 ccw(c18.01,69.82) 18.01,69.282 ; R3.1@17.728,57.188 ccw(c16.835,58.081) 18.098,58.081 ; R3.1@17.728,57.188 ccw(c16.835,58.081) 18.098,58.081 ; R3.1@17.728,57.188 ccw(c16.835,58.081) 18.098,58.081 ; 18.098,58.081 ccw(c19.361,58.081) R3.1@18.468,57.188 ; 18.098,58.081 ccw(c19.361,58.081) R3.1@18.468,57.188 ; 18.098,58.081 ccw(c19.361,58.081) R3.1@18.468,57.188
SWCLK: P1.3 U1.37 | length 64.6
  Top Layer w0.254: U1.37@65.378,76.613 67.105,76.613 67.691,76.027 v1(67.691,58.911) ; v1@67.511,59.091 ccw(c67.078,59.524) 67.691,59.524 ; v1@67.511,59.091 ccw(c67.078,59.524) 67.691,59.524 ; v1@67.511,59.091 ccw(c67.078,59.524) 67.691,59.524 ; 67.691,59.524 ccw(c68.304,59.524) v1@67.871,59.091 ; 67.691,59.524 ccw(c68.304,59.524) v1@67.871,59.091 ; 67.691,59.524 ccw(c68.304,59.524) v1@67.871,59.091
  Bottom Layer w0.254: v1(67.691,58.911) 87.308,58.911 P1.3@88.583,60.186 ; v1@67.871,58.731 cw(c68.304,58.298) 68.304,58.911 ; v1@67.871,58.731 cw(c68.304,58.298) 68.304,58.911 ; v1@67.871,58.731 cw(c68.304,58.298) 68.304,58.911 ; v1@67.871,59.091 ccw(c68.304,59.524) 68.304,58.911 ; v1@67.871,59.091 ccw(c68.304,59.524) 68.304,58.911 ; v1@67.871,59.091 ccw(c68.304,59.524) 68.304,58.911 ; 87.519,59.122 ccw(c86.456,60.186) P1.3@87.96,60.186 ; 87.519,59.122 cw(c88.583,58.059) P1.3@88.583,59.563 ; 87.519,59.122 ccw(c86.456,60.186) P1.3@87.96,60.186 ; 87.519,59.122 cw(c88.583,58.059) P1.3@88.583,59.563 ; 87.519,59.122 ccw(c86.456,60.186) P1.3@87.96,60.186 ; 87.519,59.122 cw(c88.583,58.059) P1.3@88.583,59.563 ; 87.808,59.618 cw(c88.751,59.366) P1.3@88.555,60.322 ; 87.808,59.618 cw(c88.751,59.366) P1.3@88.555,60.322 ; 87.808,59.618 cw(c88.751,59.366) P1.3@88.555,60.322 ; 87.953,59.556 ccw(c87.323,60.186) P1.3@88.214,60.186 ; 87.953,59.556 cw(c88.583,58.926) P1.3@88.583,59.817 ; 87.953,59.556 ccw(c87.323,60.186) P1.3@88.214,60.186 ; 87.953,59.556 cw(c88.583,58.926) P1.3@88.583,59.817 ; 87.953,59.556 ccw(c87.323,60.186) P1.3@88.214,60.186 ; 87.953,59.556 cw(c88.583,58.926) P1.3@88.583,59.817 ; 88.015,59.411 ccw(c87.763,60.354) P1.3@88.719,60.158 ; 88.015,59.411 ccw(c87.763,60.354) P1.3@88.719,60.158 ; 88.015,59.411 ccw(c87.763,60.354) P1.3@88.719,60.158
SWDIO: P1.4 U1.34 | length 78.4
  Top Layer w0.254: U1.34@62.774,75.009 62.774,57.224 v1(63.373,56.625) ; 62.939,57.059 ccw(c63.373,57.492) v1@63.373,56.879 ; 62.939,57.059 cw(c62.506,56.625) v1@63.119,56.625 ; 62.939,57.059 ccw(c63.373,57.492) v1@63.373,56.879 ; 62.939,57.059 cw(c62.506,56.625) v1@63.119,56.625 ; 62.939,57.059 ccw(c63.373,57.492) v1@63.373,56.879 ; 62.939,57.059 cw(c62.506,56.625) v1@63.119,56.625 ; 63.033,56.945 ccw(c63.462,57.06) v1(63.373,56.625) ; 63.033,56.945 ccw(c63.462,57.06) v1(63.373,56.625) ; 63.033,56.945 ccw(c63.462,57.06) v1(63.373,56.625) ; 63.053,56.965 cw(c62.938,56.536) v1(63.373,56.625) ; 63.053,56.965 cw(c62.938,56.536) v1(63.373,56.625) ; 63.053,56.965 cw(c62.938,56.536) v1(63.373,56.625)
  Bottom Layer w0.254: P1.4@88.583,57.646 87.308,56.371 63.627,56.371 v1(63.373,56.625) ; v1(63.373,56.625) ccw(c63.986,57.238) 63.986,56.371 ; v1(63.373,56.625) cw(c63.611,56.359) 63.789,56.668 ; v1(63.373,56.625) ccw(c63.986,57.238) 63.986,56.371 ; v1(63.373,56.625) cw(c63.611,56.359) 63.789,56.668 ; v1(63.373,56.625) cw(c63.611,56.359) 63.789,56.668 ; v1(63.373,56.625) ccw(c63.986,57.238) 63.986,56.371 ; v1@63.496,56.403 cw(c63.627,56.167) 63.762,56.401 ; v1@63.496,56.403 cw(c63.627,56.167) 63.762,56.401 ; v1@63.496,56.403 cw(c63.627,56.167) 63.762,56.401 ; v1@63.542,56.436 cw(c63.857,56.083) 64.094,56.492 ; v1@63.542,56.436 cw(c63.857,56.083) 64.094,56.492 ; v1@63.542,56.436 cw(c63.857,56.083) 64.094,56.492 ; v1@63.553,56.805 ccw(c64.599,57.851) 64.599,56.371 ; v1@63.553,56.805 ccw(c64.599,57.851) 64.599,56.371 ; v1@63.553,56.805 ccw(c64.599,57.851) 64.599,56.371 ; v1@63.627,56.629 ccw(c63.897,56.634) 63.762,56.401 ; v1@63.627,56.629 ccw(c63.897,56.634) 63.762,56.401 ; v1@63.627,56.629 ccw(c63.897,56.634) 63.762,56.401 ; 87.519,56.582 ccw(c86.456,57.646) P1.4@87.96,57.646 ; 87.519,56.582 cw(c88.583,55.519) P1.4@88.583,57.023 ; 87.519,56.582 ccw(c86.456,57.646) P1.4@87.96,57.646 ; 87.519,56.582 cw(c88.583,55.519) P1.4@88.583,57.023 ; 87.519,56.582 ccw(c86.456,57.646) P1.4@87.96,57.646 ; 87.519,56.582 cw(c88.583,55.519) P1.4@88.583,57.023 ; 87.808,57.078 cw(c88.751,56.826) P1.4@88.555,57.782 ; 87.808,57.078 cw(c88.751,56.826) P1.4@88.555,57.782 ; 87.808,57.078 cw(c88.751,56.826) P1.4@88.555,57.782 ; 87.953,57.016 ccw(c87.323,57.646) P1.4@88.214,57.646 ; 87.953,57.016 cw(c88.583,56.386) P1.4@88.583,57.277 ; 87.953,57.016 ccw(c87.323,57.646) P1.4@88.214,57.646 ; 87.953,57.016 cw(c88.583,56.386) P1.4@88.583,57.277 ; 87.953,57.016 ccw(c87.323,57.646) P1.4@88.214,57.646 ; 87.953,57.016 cw(c88.583,56.386) P1.4@88.583,57.277 ; 88.015,56.871 ccw(c87.763,57.814) P1.4@88.719,57.618 ; 88.015,56.871 ccw(c87.763,57.814) P1.4@88.719,57.618 ; 88.015,56.871 ccw(c87.763,57.814) P1.4@88.719,57.618
TEMPER: R25.1 U1.25 U5.2 | length 150.1
  Top Layer w0.254: v1(46.228,19.033) 46.228,40.496 46.99,41.258 57.514,41.258 58.274,42.018 U1.25@58.274,75.009 ; R25.1@85.154,18.845 85.22,18.911 U5.2@89.599,18.911 ; v1@46.048,19.213 ccw(c45.615,19.646) 46.228,19.646 ; v1@46.048,19.213 ccw(c45.615,19.646) 46.228,19.646 ; v1@46.048,19.213 ccw(c45.615,19.646) 46.228,19.646 ; 46.228,19.646 ccw(c46.841,19.646) v1@46.408,19.213 ; 46.228,19.646 ccw(c46.841,19.646) v1@46.408,19.213 ; 46.228,19.646 ccw(c46.841,19.646) v1@46.408,19.213 ; R25.1@85.444,18.655 cw(c86.063,18.036) 86.063,18.911 ; R25.1@85.444,18.655 cw(c86.063,18.036) 86.063,18.911 ; R25.1@85.444,18.655 cw(c86.063,18.036) 86.063,18.911 ; R25.1@85.624,18.475 cw(c86.676,17.423) 86.676,18.911 ; R25.1@85.624,18.475 cw(c86.676,17.423) 86.676,18.911 ; R25.1@85.624,18.475 cw(c86.676,17.423) 86.676,18.911 ; R25.1@85.624,19.215 ccw(c86.357,19.948) 86.357,18.911 ; R25.1@85.624,19.215 ccw(c86.357,19.948) 86.357,18.911 ; R25.1@85.624,19.215 ccw(c86.357,19.948) 86.357,18.911 ; 88.095,18.911 ccw(c88.095,20.415) U5.2@89.158,19.352 ; 88.095,18.911 cw(c88.095,17.407) U5.2@89.158,18.47 ; 88.095,18.911 ccw(c88.095,20.415) U5.2@89.158,19.352 ; 88.095,18.911 cw(c88.095,17.407) U5.2@89.158,18.47 ; 88.095,18.911 ccw(c88.095,20.415) U5.2@89.158,19.352 ; 88.095,18.911 cw(c88.095,17.407) U5.2@89.158,18.47 ; 88.708,18.911 ccw(c88.708,19.802) U5.2@89.338,19.172 ; 88.708,18.911 cw(c88.708,18.02) U5.2@89.338,18.65 ; 88.708,18.911 ccw(c88.708,19.802) U5.2@89.338,19.172 ; 88.708,18.911 cw(c88.708,18.02) U5.2@89.338,18.65 ; 88.708,18.911 ccw(c88.708,19.802) U5.2@89.338,19.172 ; 88.708,18.911 cw(c88.708,18.02) U5.2@89.338,18.65
  Bottom Layer w0.254: v1(46.228,19.033) U5.2@89.477,19.033 ; v1@46.408,18.853 cw(c46.841,18.42) 46.841,19.033 ; v1@46.408,18.853 cw(c46.841,18.42) 46.841,19.033 ; v1@46.408,18.853 cw(c46.841,18.42) 46.841,19.033 ; v1@46.408,19.213 ccw(c46.841,19.646) 46.841,19.033 ; v1@46.408,19.213 ccw(c46.841,19.646) 46.841,19.033 ; v1@46.408,19.213 ccw(c46.841,19.646) 46.841,19.033 ; 87.8,19.033 cw(c87.8,17.112) U5.2@89.158,18.47 ; 87.8,19.033 cw(c87.8,17.112) U5.2@89.158,18.47 ; 87.8,19.033 cw(c87.8,17.112) U5.2@89.158,18.47 ; 88.389,19.033 ccw(c88.389,20.121) U5.2@89.158,19.352 ; 88.389,19.033 ccw(c88.389,20.121) U5.2@89.158,19.352 ; 88.389,19.033 ccw(c88.389,20.121) U5.2@89.158,19.352 ; 88.414,19.033 cw(c88.414,17.726) U5.2@89.338,18.65 ; 88.414,19.033 cw(c88.414,17.726) U5.2@89.338,18.65 ; 88.414,19.033 cw(c88.414,17.726) U5.2@89.338,18.65
TX1: P2.2 U1.30 | length 79.4
  Top Layer w0.254: U1.30@60.774,75.009 60.774,51.223 v1(61.341,50.656) ; 60.907,51.09 ccw(c61.341,51.523) v1@61.341,50.91 ; 60.907,51.09 cw(c60.474,50.656) v1@61.087,50.656 ; 60.907,51.09 ccw(c61.341,51.523) v1@61.341,50.91 ; 60.907,51.09 cw(c60.474,50.656) v1@61.087,50.656 ; 60.907,51.09 ccw(c61.341,51.523) v1@61.341,50.91 ; 60.907,51.09 cw(c60.474,50.656) v1@61.087,50.656 ; 61.001,50.976 ccw(c61.43,51.091) v1(61.341,50.656) ; 61.001,50.976 ccw(c61.43,51.091) v1(61.341,50.656) ; 61.001,50.976 ccw(c61.43,51.091) v1(61.341,50.656) ; 61.021,50.996 cw(c60.906,50.567) v1(61.341,50.656) ; 61.021,50.996 cw(c60.906,50.567) v1(61.341,50.656) ; 61.021,50.996 cw(c60.906,50.567) v1(61.341,50.656)
  Bottom Layer w0.254: v1(61.341,50.656) 78.486,50.656 79.866,49.276 87.301,49.276 P2.2@88.583,47.994 ; v1@61.521,50.476 cw(c61.954,50.043) 61.954,50.656 ; v1@61.521,50.476 cw(c61.954,50.043) 61.954,50.656 ; v1@61.521,50.476 cw(c61.954,50.043) 61.954,50.656 ; v1@61.521,50.836 ccw(c61.954,51.269) 61.954,50.656 ; v1@61.521,50.836 ccw(c61.954,51.269) 61.954,50.656 ; v1@61.521,50.836 ccw(c61.954,51.269) 61.954,50.656 ; 87.519,49.058 ccw(c88.583,50.121) P2.2@88.583,48.617 ; 87.519,49.058 cw(c86.456,47.994) P2.2@87.96,47.994 ; 87.519,49.058 ccw(c88.583,50.121) P2.2@88.583,48.617 ; 87.519,49.058 cw(c86.456,47.994) P2.2@87.96,47.994 ; 87.519,49.058 ccw(c88.583,50.121) P2.2@88.583,48.617 ; 87.519,49.058 cw(c86.456,47.994) P2.2@87.96,47.994 ; 87.808,48.562 ccw(c88.751,48.814) P2.2@88.555,47.858 ; 87.808,48.562 ccw(c88.751,48.814) P2.2@88.555,47.858 ; 87.808,48.562 ccw(c88.751,48.814) P2.2@88.555,47.858 ; 87.953,48.624 ccw(c88.583,49.254) P2.2@88.583,48.363 ; 87.953,48.624 cw(c87.323,47.994) P2.2@88.214,47.994 ; 87.953,48.624 ccw(c88.583,49.254) P2.2@88.583,48.363 ; 87.953,48.624 cw(c87.323,47.994) P2.2@88.214,47.994 ; 87.953,48.624 ccw(c88.583,49.254) P2.2@88.583,48.363 ; 87.953,48.624 cw(c87.323,47.994) P2.2@88.214,47.994 ; 88.015,48.769 cw(c87.763,47.826) P2.2@88.719,48.022 ; 88.015,48.769 cw(c87.763,47.826) P2.2@88.719,48.022 ; 88.015,48.769 cw(c87.763,47.826) P2.2@88.719,48.022
TX3: U1.21 U6.29 | length 65
  Top Layer w0.254: U6.29@16.477,77.277 v1(19.382,77.277) v1@19.431,77.326 ; U1.21@56.67,78.113 52.603,78.113 v1(52.07,77.58) ; U6.29@17.63,77.124 cw(c17.998,76.756) 17.998,77.277 ; U6.29@17.63,77.124 cw(c17.998,76.756) 17.998,77.277 ; U6.29@17.63,77.124 cw(c17.998,76.756) 17.998,77.277 ; U6.29@17.63,77.44 ccw(c18.022,77.832) 18.022,77.277 ; U6.29@17.63,77.44 ccw(c18.022,77.832) 18.022,77.277 ; U6.29@17.63,77.44 ccw(c18.022,77.832) 18.022,77.277 ; 18.769,77.277 ccw(c18.769,77.89) v1@19.202,77.457 ; 18.769,77.277 cw(c18.769,76.664) v1@19.202,77.097 ; 18.769,77.277 ccw(c18.769,77.89) v1@19.202,77.457 ; 18.769,77.277 cw(c18.769,76.664) v1@19.202,77.097 ; 18.769,77.277 ccw(c18.769,77.89) v1@19.202,77.457 ; 18.769,77.277 cw(c18.769,76.664) v1@19.202,77.097 ; v1(52.07,77.58) ccw(c51.981,78.015) 52.41,77.9 ; v1(52.07,77.58) cw(c52.505,77.491) 52.39,77.92 ; v1(52.07,77.58) ccw(c51.981,78.015) 52.41,77.9 ; v1(52.07,77.58) cw(c52.505,77.491) 52.39,77.92 ; v1(52.07,77.58) ccw(c51.981,78.015) 52.41,77.9 ; v1(52.07,77.58) cw(c52.505,77.491) 52.39,77.92 ; v1@52.07,77.834 ccw(c52.07,78.447) 52.504,78.014 ; v1@52.07,77.834 ccw(c52.07,78.447) 52.504,78.014 ; v1@52.07,77.834 ccw(c52.07,78.447) 52.504,78.014 ; v1@52.324,77.58 cw(c52.937,77.58) 52.504,78.014 ; v1@52.324,77.58 cw(c52.937,77.58) 52.504,78.014 ; v1@52.324,77.58 cw(c52.937,77.58) 52.504,78.014
  Bottom Layer w0.254: v1@19.431,77.326 51.816,77.326 v1(52.07,77.58) ; v1@19.562,77.097 cw(c20.114,76.546) 20.114,77.326 ; v1@19.562,77.097 cw(c20.114,76.546) 20.114,77.326 ; v1@19.562,77.097 cw(c20.114,76.546) 20.114,77.326 ; v1@19.562,77.457 ccw(c19.877,77.772) 19.877,77.326 ; v1@19.562,77.457 ccw(c19.877,77.772) 19.877,77.326 ; v1@19.562,77.457 ccw(c19.877,77.772) 19.877,77.326 ; 50.844,77.326 ccw(c50.844,78.806) v1@51.89,77.76 ; 50.844,77.326 ccw(c50.844,78.806) v1@51.89,77.76 ; 50.844,77.326 ccw(c50.844,78.806) v1@51.89,77.76 ; 51.349,77.447 cw(c51.586,77.038) v1@51.901,77.391 ; 51.349,77.447 cw(c51.586,77.038) v1@51.901,77.391 ; 51.349,77.447 cw(c51.586,77.038) v1@51.901,77.391 ; 51.457,77.326 ccw(c51.457,78.193) v1(52.07,77.58) ; 51.457,77.326 ccw(c51.457,78.193) v1(52.07,77.58) ; 51.457,77.326 ccw(c51.457,78.193) v1(52.07,77.58) ; 51.654,77.623 cw(c51.832,77.314) v1(52.07,77.58) ; 51.654,77.623 cw(c51.832,77.314) v1(52.07,77.58) ; 51.654,77.623 cw(c51.832,77.314) v1(52.07,77.58) ; 51.681,77.356 ccw(c51.546,77.589) v1@51.816,77.584 ; 51.681,77.356 cw(c51.816,77.122) v1@51.947,77.358 ; 51.681,77.356 ccw(c51.546,77.589) v1@51.816,77.584 ; 51.681,77.356 cw(c51.816,77.122) v1@51.947,77.358 ; 51.681,77.356 ccw(c51.546,77.589) v1@51.816,77.584 ; 51.681,77.356 cw(c51.816,77.122) v1@51.947,77.358
VBAT: D3.2 D4.2 U1.1 | length 43.3
  Top Layer w0.254: U1.1@63.774,83.717 63.774,85.688 64.262,86.176 74.208,86.176 74.415,85.969 ; D3.2@74.415,81.649 D4.2@74.415,84.697 74.415,85.969 ; D3.2@73.974,82.34 ccw(c72.911,83.403) 74.415,83.403 ; D3.2@73.974,82.34 ccw(c72.911,83.403) 74.415,83.403 ; D3.2@73.974,82.34 ccw(c72.911,83.403) 74.415,83.403 ; D4.2@73.974,84.006 cw(c72.911,82.943) 74.415,82.943 ; D4.2@73.974,84.006 cw(c72.911,82.943) 74.415,82.943 ; D4.2@73.974,84.006 cw(c72.911,82.943) 74.415,82.943 ; D4.2@74.13,85.501 ccw(c73.888,85.969) 74.415,85.969 ; D4.2@74.13,85.501 ccw(c73.888,85.969) 74.415,85.969 ; D4.2@74.13,85.501 ccw(c73.888,85.969) 74.415,85.969 ; D3.2@74.154,82.16 ccw(c73.524,82.79) 74.415,82.79 ; D3.2@74.154,82.16 ccw(c73.524,82.79) 74.415,82.79 ; D3.2@74.154,82.16 ccw(c73.524,82.79) 74.415,82.79 ; D4.2@74.154,84.186 cw(c73.524,83.556) 74.415,83.556 ; D4.2@74.154,84.186 cw(c73.524,83.556) 74.415,83.556 ; D4.2@74.154,84.186 cw(c73.524,83.556) 74.415,83.556 ; 74.415,82.79 ccw(c75.306,82.79) D3.2@74.676,82.16 ; 74.415,82.79 ccw(c75.306,82.79) D3.2@74.676,82.16 ; 74.415,82.79 ccw(c75.306,82.79) D3.2@74.676,82.16 ; 74.415,82.943 cw(c75.919,82.943) D4.2@74.856,84.006 ; 74.415,82.943 cw(c75.919,82.943) D4.2@74.856,84.006 ; 74.415,82.943 cw(c75.919,82.943) D4.2@74.856,84.006 ; 74.415,83.403 ccw(c75.919,83.403) D3.2@74.856,82.34 ; 74.415,83.403 ccw(c75.919,83.403) D3.2@74.856,82.34 ; 74.415,83.403 ccw(c75.919,83.403) D3.2@74.856,82.34 ; 74.415,83.556 cw(c75.306,83.556) D4.2@74.676,84.186 ; 74.415,83.556 cw(c75.306,83.556) D4.2@74.676,84.186 ; 74.415,83.556 cw(c75.306,83.556) D4.2@74.676,84.186 ; 74.415,85.969 ccw(c74.942,85.969) D4.2@74.7,85.501 ; 74.415,85.969 ccw(c74.942,85.969) D4.2@74.7,85.501 ; 74.415,85.969 ccw(c74.942,85.969) D4.2@74.7,85.501